# Altium PCB alcotest.PcbDoc
Units mm, origin at the board's own origin, x right, y up, seen from the top; angles counter-clockwise.
Board outline 80 x 36 mm, 2 copper layers (Top Layer, Bottom Layer); 34 components, 21 nets, 123 pads, 62 vias.
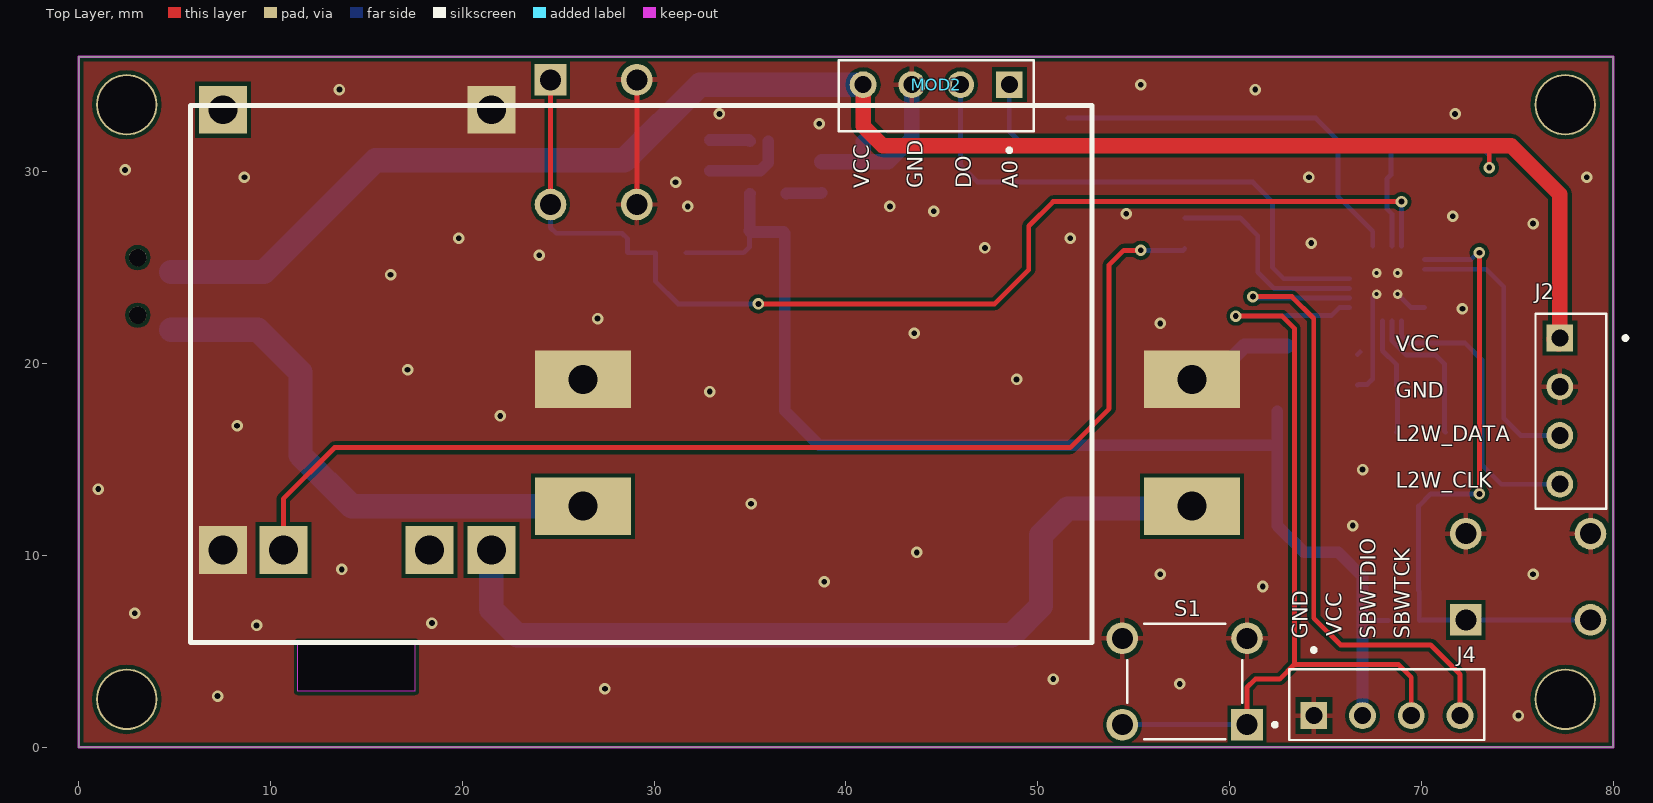
[diagram p0: Top Layer view]
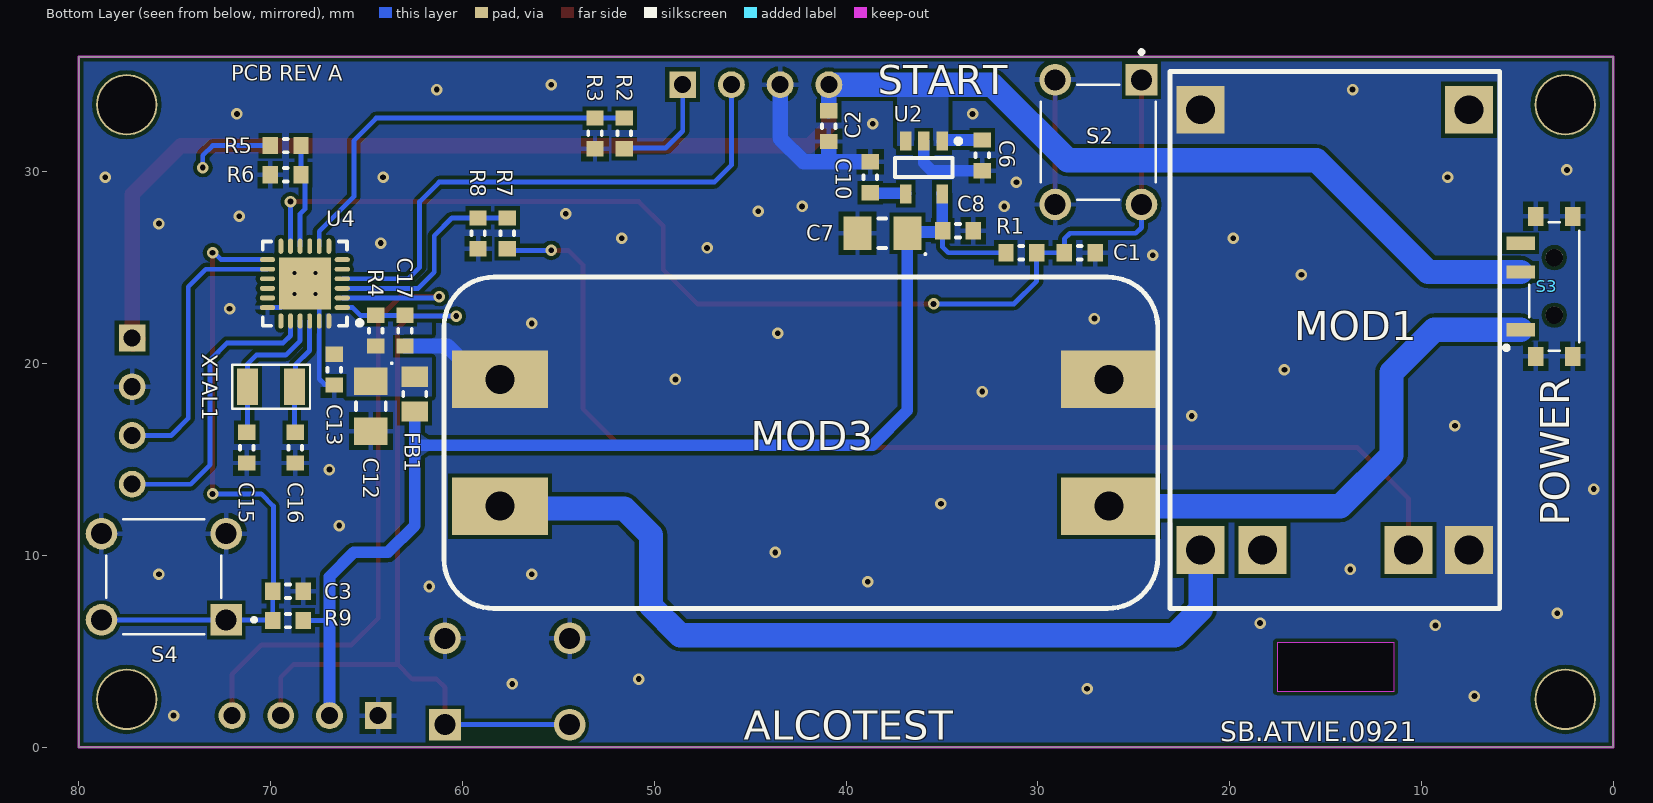
[diagram p1: Bottom Layer view, seen from below]
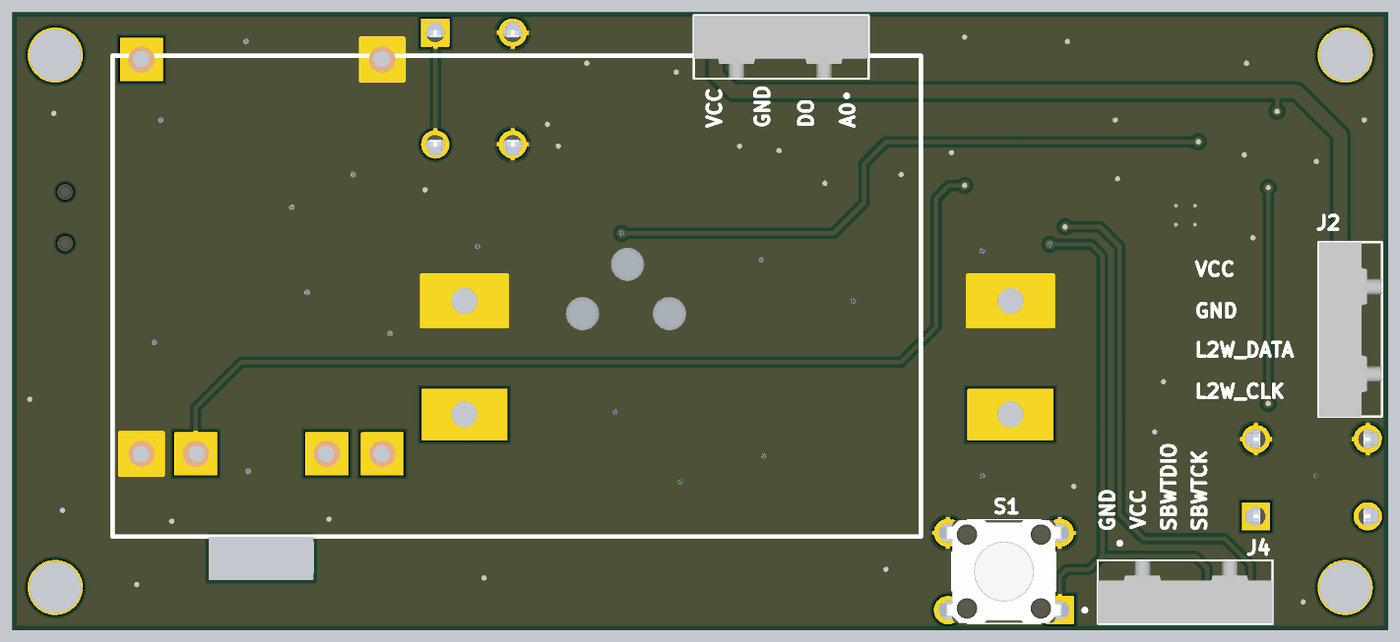
[diagram p2: 3D render of the assembled board from above, using the file's embedded part models]

## Layer stack, top to bottom
Top Solder: solder mask 0.0102, Solder Resist, Dk 3.5
Top Layer: signal copper 0.0356
Dielectric 1: dielectric 0.32, FR-4, Dk 4.8
Bottom Layer: signal copper 0.0356
Bottom Solder: solder mask 0.0102, Solder Resist, Dk 3.5

## Board outline
0,0 80,0 80,36 0,36
cut-out: 11.43,5.461 17.526,5.461 17.526,2.921 11.43,2.921

## Design rules (kind name [scope] priority, off if disabled: settings)
Clearance [All] p1: gap=0.2 ignorepadtopadclearanceinfootprint=FALSE except(0: Arc-Hole Track-Hole SMDPad-Hole THPad-Hole Via-Hole Fill-Hole Poly-Hole Region-Hole Text-Hole; 0.127: Arc-SMDPad Arc-THPad Arc-Text Track-SMDPad Track-THPad Track-Text SMDPad-SMDPad SMDPad-THPad SMDPad-Text THPad-THPad THPad-Text Via-Text Fill-Text Poly-Text Region-Text Text-Text)
PolygonConnect [All] p1: thpad.connectstyle=Relief thpad.reliefconductorwidth=0.254 thpad.reliefentries=4 thpad.polygonreliefangle="90 Angle" thpad.airgapwidth=0.254 smdpad.connectstyle=Relief smdpad.reliefconductorwidth=0.254 smdpad.reliefentries=4 smdpad.polygonreliefangle="90 Angle" smdpad.airgapwidth=0.254 via.connectstyle=Direct via.reliefconductorwidth=0.254 via.reliefentries=4 via.polygonreliefangle="90 Angle" via.airgapwidth=0.254
RoutingVias [All] p1: holewidth=0.3 width=0.6 viastyle="Through Hole" minholewidth=0.3 minwidth=0.6 maxholewidth=0.711 maxwidth=1.27
SolderMaskExpansion [All] p1: expansion=0.102 istentingtop=FALSE
Width [All] p1: maxlimit=2.54 minlimit=0.254 preferedwidth=0.254 minimp=50.000000 maximp=50.000000 favimp=50.000000
30 further rules are at their usual default settings.

## Classes and differential pairs
component class alcotest: C1 C2 C6 C8 C10 C12 C13 C15 C16 C17 FB1 J2 J4 MOD1 MOD2 MOD3 R1 R2 R3 R4 R5 R6 R7 R8 S1 S2 S3 U2 U4

## Components (designator, comment, footprint, x,y, rotation, side; value= is the part's Value field where it differs from the comment)
C1 "100nF/16V" "SMD 0603 GENERIC" 27.813,25.781 r0 bottom
C2 "100nF/16V" "SMD 0603 GENERIC" 40.894,32.385 r90 bottom
C3 "100nF/16V" "SMD 0603 GENERIC" 69.088,8.128 r0 bottom
C6 "100nF" "SMD 0603 GENERIC" 32.893,30.861 r90 bottom
C7 "10uF" "SMD 1206 POLARIZED" 38.1,26.797 r0 bottom
C8 "100nF" "SMD 0603 GENERIC" 34.163,26.924 r0 bottom
C10 "10nF" "SMD 0603 GENERIC" 38.735,29.718 r270 bottom
C12 "4,7uF" "SMD 1206 POLARIZED" 64.77,17.78 r270 bottom
C13 "100nF" "SMD 0603 GENERIC" 66.675,19.685 r90 bottom
C15 "12pF" "SMD 0603 GENERIC" 71.247,15.621 r90 bottom
C16 "12pF" "SMD 0603 GENERIC" 68.707,15.621 r90 bottom
C17 "1nF" "SMD 0603 GENERIC" 62.992,21.717 r90 bottom
FB1 "11R 100 MHz 1.5A" "SMD 0805 GENERIC" 62.484,18.415 r270 bottom
J2 "LCD2WIRE" "THT CON 4-PIN 2.54 WHITE" 77.216,17.526 r270 top
J4 "SPY-BY-WIRE" "THT CON 4-PIN 2.54 WHITE" 68.199,1.651 r0 top
MOD1 "MOD TC4056A 5V 1A" "THT MOD TC4056A 5V 1A" 23.114,35.237 r270 bottom
MOD2 "MOD GAS MQ3" "THT MOD MQ3" 44.704,34.544 r180 top
MOD3 "MOD MT3608 DC/DC BOOST 2A" "THT MOD MT3608 DC/DC BOOST CONV 2A" 23.749,24.511 r0 bottom
R1 "10K" "SMD 0603 GENERIC" 30.861,25.781 r0 bottom
R2 "10K" "SMD 0603 GENERIC" 51.562,32.004 r90 bottom
R3 "10K" "SMD 0603 GENERIC" 53.086,32.004 r270 bottom
R4 "47K" "SMD 0603 GENERIC" 64.516,21.717 r270 bottom
R5 "10K" "SMD 0603 GENERIC" 69.215,31.369 r180 bottom
R6 "10K" "SMD 0603 GENERIC" 69.215,29.845 r0 bottom
R7 "10K" "SMD 0603 GENERIC" 57.658,26.797 r90 bottom
R8 "10K" "SMD 0603 GENERIC" 59.182,26.797 r270 bottom
R9 "10K" "SMD 0603 GENERIC" 69.088,6.604 r180 bottom
S1 "RESET" "THT SWC OMRON B3F-1022" 57.658,3.302 r180 top
S2 "MQ3_PB" "THT SWC OMRON B3F-1022" 26.718,31.548 r270 bottom
S3 "SWC PCM12SM" "SMD SWC PCM12" 3.075,24.027 r90 bottom
S4 "AUX_PB" "THT SWC OMRON B3F-1022" 75.565,8.763 r0 bottom
U2 "TPS79333DBVR" SOT23-5 35.941,30.226 r270 bottom
U4 "MSP430FR2433" VQFN-24 68.211,24.175 r0 bottom
XTAL1 "32.768 KHz" "SMD-2 XTAL ABRACON" 69.977,18.796 r0 bottom

## Footprints (in the part's own frame and the unit in brackets; to place one, negate y for a bottom-side part, rotate by r counter-clockwise, add the part's x,y. Pads: shape width x height; smd on the part's side, far side on the other; paste and mask are expansions set on the pad)
"SMD 0603 GENERIC" [mm]
  rect 0.8x0.9 smd: 1(-0.8,0) 2(0.8,0)
  silkscreen extent -0.1,-0.35 0.1,0.35, body extent -0.85,-0.45 0.85,0.45, height 0.55
"SMD 0805 GENERIC" [mm]
  rect 1.05x1.4 smd: 1(-0.9,0) 2(0.9,0)
  silkscreen extent -0.1,-0.6 0.1,0.6, body extent -1.05,-0.7 1.05,0.7, height 0.6
"SMD 1206 POLARIZED" [mm] "BAUFORM A"
  rect 1.45x1.75 smd: 1(-1.3,0) 2(1.3,0)
  silkscreen extent -2.29,-0.77 0.2,1.14, body extent -1.65,-0.85 1.65,0.85, height 1.6
"SMD SWC PCM12" [mm]
  rect 0.7x1.5 smd: 1(-2.25,1.75) 2(0.75,1.75) 3(2.25,1.75)
  rect 1x0.8 smd: SH(-3.65,-0.965) SH(-3.65,0.965) SH(3.65,-0.965) SH(3.65,0.965)
  round 0.9 hole 0.9 unplated: ""(-1.5,0) ""(1.5,0)
  silkscreen extent -3.35,-1.3 3.35,2.6, body extent -3.86,-2.79 3.86,2.18, height 1.4
"SMD-2 XTAL ABRACON" [mil]
  rect 43x75 smd: 1(-48,0) 2(48,0)
  silkscreen extent -80,-45 80,45, body extent -98,-65 99,65, height 51
SOT23-5 [mm]
  rect 1x0.6 smd: 1(-1.375,0.95) 2(-1.375,0) 3(-1.375,-0.95) 4(1.375,-0.95) 5(1.375,0.95)
  silkscreen extent -1.5,-1.5 0.5,1.92, body extent -0.88,-1.5 0.87,1.5, height 1.45
"THT CON 4-PIN 2.54 WHITE" [mm]
  rect 1.398x1.398 hole 0.89: 1(-3.81,0)
  round 1.398 hole 0.89: 2(-1.27,0) 3(1.27,0) 4(3.81,0)
  silkscreen extent -5.08,-1.27 5.08,3.52, body extent -5.08,-1.25 5.08,2.4, height 9.5
"THT MOD MQ3" [mm]
  rect 1.398x1.398 hole 0.89: 1(-3.81,0)
  round 1.398 hole 0.89: 2(-1.27,0) 3(1.27,0) 4(3.81,0)
  silkscreen extent -5.08,-1.27 5.08,3.52, body extent -5.08,-1.25 5.08,2.4, height 9.5
"THT MOD MT3608 DC/DC BOOST CONV 2A" [mm]
  rect 5x3 hole 1.5: 1(2.54,11.938) 2(2.54,5.334) 3(34.29,11.938) 4(34.29,5.334)
  silkscreen extent 0,0 37.21,17.27, body extent -0.09,-0.49 36.91,17.22, height 5.97
"THT MOD TC4056A 5V 1A" [mm]
  rect 2.5x2.5 hole 1.5: 1(2,15.6) 2(2,1.6) 3(24.95,1.6) 4(24.95,15.6) 5(24.95,4.826) 6(24.95,12.446)
  silkscreen extent 0,0 28,17.2, body extent -0.62,0.14 27.97,17.14, height 3.66
"THT SWC OMRON B3F-1022" [mm]
  rect 1.65x1.65 hole 1.1: 1(-3.25,2.123)
  round 1.65 hole 1.1: 2(3.25,2.123) 3(-3.25,-2.377) 4(3.25,-2.377)
  silkscreen extent -4.8,-3.13 3,2.87, body extent -3.85,-3.13 3.85,2.87, height 5.2
VQFN-24 [mm]
  oval 0.8x0.25 smd: 1(-1.95,1.25) 2(-1.95,0.75) 3(-1.95,0.25) 4(-1.95,-0.25) 5(-1.95,-0.75) 6(-1.95,-1.25) 13(1.95,-1.25) 14(1.95,-0.75) 15(1.95,-0.25) 16(1.95,0.25) 17(1.95,0.75) 18(1.95,1.25)
  oval 0.25x0.8 smd: 7(-1.25,-1.95) 8(-0.75,-1.95) 9(-0.25,-1.95) 10(0.25,-1.95) 11(0.75,-1.95) 12(1.25,-1.95) 19(1.25,1.95) 20(0.75,1.95) 21(0.25,1.95) 22(-0.25,1.95) 23(-0.75,1.95) 24(-1.25,1.95)
  rect 2.7x2.7 smd: 25(0,0)
  silkscreen extent -2.97,-2.2 2.2,2.2, body extent -2.05,-2.05 2.05,2.05, height 1

## Part data
C1 C2 C3 C6 C8 C13: library part "CAP SMD CER 100nF 16V 10% X7R 0603"
C7: library part "CAP SMD TAN 10uF 16V 10% 1206"
C10: library part "CAP SMD CER 10nF 16V 10% X7R 0603"
C12: library part "CAP SMD TAN 4,7uF 35V 10% 1206"
C15 C16: library part "CAP SMD CER 12pF 25V 10% C0G 0603"
C17: library part "CAP SMD CER 1nF 16V 10% X7R 0603"
FB1: library part "FBD SMD 11R 100MHz 1.5A 0805"
J2: library part "CON THT LCD2WIRE 4-PIN 2.54"
J4: library part "CON THT SPY-BY-WIRE 4-PIN 2.54"
R1 R2 R3 R5 R6 R7 R8 R9: library part "RES SMD 10K 1% 0603"
R4: library part "RES SMD 47K 1% 0603"
S1 S2 S4: library part "SWC OMRON B3F-1022"
U2: library part "PWR TPS79333DBVR"
U4: library part "MCU MSP430FR2433IRGET"
XTAL1: library part "XTAL SMD 32.768 KHz ABRACON"

## Free pads (board coordinates)
  round 3.2 hole 3: 1(2.5,2.5) 1(2.5,33.5) 1(77.5,2.5) 1(77.5,33.5)

## Via types
v1: diameter 0.6, hole 0.3, Top Layer to Bottom Layer, tented both sides, 58 vias
v2: diameter 0.5, hole 0.2, Top Layer to Bottom Layer, tented both sides, 4 vias

## Nets (pads, with @x,y where several pads share a name; then routed paths per layer and width w, separated by ;. In a path a pad name is that pad's centre, name@x,y a point inside that pad or via, vN(x,y) a via of type N, cw(c..) or ccw(c..) an arc to the next point about the centre after c; other vN are vias at no path point)
3V3: C7.1 C8.2 FB1.2 J4.2 R1.2 R9.2 U2.5 | length 63.8
  Bottom Layer w0.254: R1.2 34.671,25.781 34.963,26.073 C8.2 ; 66.929,6.604 R9.2
  Bottom Layer w0.61: U2.5 34.986,28.846 34.986,26.947 C8.2 35.026,26.86 36.737,26.86 C7.1 36.8,17.556 38.608,15.748 62.357,15.748 ; FB1.2 62.484,15.748 62.484,11.557 63.881,10.16 65.659,10.16 66.929,8.89 66.929,6.604 J4.2
3V3_FILT: C12.1 C13.2 FB1.1 R4.2 U4.24 | length 0.2
  Bottom Layer w0.254: C13.2 C13.2@66.802,20.612
5V: C2.2 C6.2 J2.1 MOD2.4 R5.1 S3.2 U2.1 U2.3 | length 97.1
  Top Layer w0.254: v1(73.533,30.226) 73.533,31.369
  Top Layer w0.8: MOD2.4 40.894,32.385 41.91,31.369 73.533,31.369 74.676,31.369 77.216,28.829 J2.1
  Top Layer w1.27: J2.1@77.152,21.272 J2.1
  Bottom Layer w0.254: R5.1 73.025,31.369 73.533,30.861 v1(73.533,30.226)
  Bottom Layer w0.61: C6.2 34.931,31.661 U2.1 ; 36.891,34.224 37.211,34.544
  Bottom Layer w0.8: C2.2 MOD2.4
  Bottom Layer w1.27: S3.2 9.64,24.777 15.47,30.607 28.448,30.607 32.385,34.544 37.211,34.544 MOD2.4
AUX_PB: C3.2 R9.1 S4.1 S4.2 U4.13 | length 33.9
  Top Layer w0.254: v1(73.025,13.208) v1(73.025,25.781)
  Bottom Layer w0.254: U4.13 72.575,25.425 72.931,25.781 v1(73.025,25.781) ; v1(73.025,13.208) 70.485,13.208 69.85,12.573 69.85,8.166 C3.2 R9.1 69.924,6.64 S4.1 S4.2
BAT_MONITOR: R7.2 R8.1 U4.3 | length 11.2
  Bottom Layer w0.254: R7.2 R8.1 60.541,27.597 61.468,26.67 61.468,24.765 62.308,23.925 U4.3
GND: C1.1 C2.1 C3.1 C6.1 C7.2 C8.1 C10.1 C12.2 C13.1 C15.1 C16.1 C17.1 J2.2 J4.1 MOD1.2 MOD1.4 MOD2.3 MOD3.2 MOD3.4 R3.2 R6.2 R8.2 S1.3 S1.4 S2.3 S2.4 S3.SH S4.3 S4.4 U2.2 U4.18 U4.23 U4.25 | length 32.8
  Top Layer w0.254: S2.4 S2.3
  Bottom Layer w0.254: 40.767,30.518 40.894,30.645 ; C13.1 66.713,18.923 67.183,18.923 67.461,19.201 U4.23 67.461,23.425 v2(67.661,23.625) ; v2(68.761,23.625) 69.461,22.925 U4.18
  Bottom Layer w0.61: C6.1 35.522,30.061 35.941,30.48 U2.2
  Bottom Layer w0.8: C10.1 40.767,30.518 42.202,30.518 43.434,31.75 MOD2.3 ; 40.894,30.645 C2.1 ; MOD3.4 59.039,19.177 60.779,20.917 C17.1
  other v1: 75.057,1.651 7.239,2.667 27.432,3.048 57.404,3.302 50.8,3.556 9.271,6.35 18.415,6.477 2.921,6.985 61.722,8.382 38.862,8.636 56.388,9.017 75.819,9.017 13.716,9.271 43.688,10.16 66.421,11.557 35.052,12.7 1.016,13.462 66.929,14.478 8.255,16.764 21.971,17.272 32.893,18.542 48.895,19.177 17.145,19.685 43.561,21.59 56.388,22.098 27.051,22.352 72.136,22.86 16.256,24.638 24.003,25.654 47.244,26.035 64.262,26.289 19.812,26.543 51.689,26.543 75.819,27.305 71.628,27.686 54.61,27.813 44.577,27.94 31.75,28.194 42.291,28.194 31.115,29.464 8.636,29.718 64.135,29.718 78.613,29.718 2.413,30.099 38.608,32.512 33.401,33.02 71.755,33.02 13.589,34.29 61.341,34.29 55.372,34.544
  other v2: 67.661,24.725 68.761,24.725
MQ3_AO: R2.2 R3.1 U4.8 | length 20.9
  Bottom Layer w0.254: R2.2 R3.1 64.516,32.804 64.516,32.766 65.659,31.623 65.659,28.702 67.461,26.9 U4.8
MQ3_DO: MOD2.2 U4.4 | length 28.9
  Bottom Layer w0.254: MOD2.2 45.974,30.353 46.863,29.464 61.214,29.464 62.23,28.448 62.23,25.019 62.824,24.425 U4.4
MQ3_PB: C1.2 R1.1 S2.1 S2.2 U4.11 | length 60.9
  Top Layer w0.254: S2.2 S2.1 ; v1(35.433,23.114) 47.752,23.114 49.53,24.892 49.53,27.178 50.8,28.448 v1(68.961,28.448)
  Bottom Layer w0.254: S2.2 24.595,27.094 24.892,26.797 28.321,26.797 28.613,26.505 C1.2 R1.1 30.061,24.295 31.242,23.114 v1(35.433,23.114) ; U4.11 v1(68.961,28.448)
NetC10_2: C10.2 U2.4 | length 1.9
  Bottom Layer w0.61: U2.4 36.891,28.88 36.896,28.885 38.701,28.885 C10.2
NetC15_2: C15.2 U4.21 XTAL1.2 | length 7.9
  Bottom Layer w0.254: U4.21 68.461,21.201 69.215,20.447 70.739,20.447 71.196,19.99 XTAL1.2 71.196,16.472 C15.2
NetC16_2: C16.2 U4.22 XTAL1.1 | length 6.2
  Bottom Layer w0.254: U4.22 67.961,20.685 68.707,19.939 68.707,18.847 XTAL1.1 68.758,16.472 C16.2
NetC17_2: C17.2 J4.3 R4.1 S1.1 S1.2 U4.1 | length 46.9
  Top Layer w0.254: v1(60.325,22.479) 62.738,22.479 63.373,21.844 63.373,4.318 ; S1.1 60.908,3.123 61.341,3.556 62.611,3.556 63.373,4.318 ; J4.3 69.469,3.647 68.798,4.318 63.373,4.318
  Bottom Layer w0.254: S1.2 S1.1 ; v1(60.325,22.479) 62.954,22.479 C17.2 R4.1 65.316,22.517 65.722,22.923 66.259,22.923 U4.1 ; J4.3@69.342,1.778 J4.3
NetJ2_3: J2.3 U4.14 | length 14.7
  Bottom Layer w0.254: U4.14 73.373,24.925 74.295,24.003 74.295,17.145 75.184,16.256 J2.3
NetJ2_4: J2.4 U4.20 | length 15.4
  Bottom Layer w0.254: U4.20 68.961,21.463 69.342,21.082 72.263,21.082 73.152,20.193 73.152,14.732 74.168,13.716 J2.4
NetJ4_4: J4.4 U4.2 | length 35.3
  Top Layer w0.254: v1(61.214,23.495) 63.246,23.495 64.389,22.352 64.389,6.731 65.786,5.334 70.485,5.334 72.009,3.81 J4.4
  Bottom Layer w0.254: v1(61.214,23.495) 61.308,23.495 61.378,23.425 U4.2
NetMOD1_3: MOD1.3 MOD3.3 | length 46.7
  Top Layer w1.27: MOD1.3 MOD1.3@22.022,9.779 ; MOD3.3@57.658,12.192 MOD3.3 MOD3.3@57.785,12.827
  Bottom Layer w1.27: MOD1.3 21.514,7.188 22.86,5.842 48.641,5.842 50.165,7.366 50.165,11.049 51.562,12.446 57.912,12.446 MOD3.3
NetMOD2_1: MOD2.1 R2.1 | length 5.8
  Bottom Layer w0.254: MOD2.1 48.514,32.131 49.403,31.242 51.524,31.242 R2.1
NetMOD3_1: MOD3.1 S3.1 | length 27.8
  Bottom Layer w1.27: S3.1 9.338,21.777 11.557,19.558 11.557,15.24 14.224,12.573 MOD3.1
V_MONITOR: R5.2 R6.1 U4.10 | length 5.4
  Bottom Layer w0.254: R5.2 R6.1 68.199,29.629 68.199,28.067 68.461,27.805 U4.10
VBAT: MOD1.6 R7.1 | length 59.4
  Top Layer w0.254: MOD1.6 10.668,12.954 13.335,15.621 51.689,15.621 53.721,17.653 53.721,25.146 54.483,25.908 v1(55.372,25.908)
  Bottom Layer w0.254: v1(55.372,25.908) 57.569,25.908 R7.1
pads on no net: MOD1.1 MOD1.5 S3. S3.3 U4.5 U4.6 U4.7 U4.9 U4.12 U4.15 U4.16 U4.17 U4.19

## Polygon pours and split planes (outlines as drawn)
GND on Top Layer "TOP_GND_POLY" (solid, remove dead copper, pour order 10): 0,35.941 80.01,35.941 80.01,0 0,0
NetC17_2 on Top Layer "NetC17_2" (solid, remove dead copper, pour order 13): 64.262,4.064
NetC17_2 on Top Layer "NetC17_2" (solid, remove dead copper, pour order 12): 63.373,4.318 62.611,3.556 64.008,3.556
no net on Top Layer "NONET_L01_P000" (solid, remove dead copper, pour order 0): 0,59.944
GND on Bottom Layer "BOTTOM_GND_POLY" (solid, remove dead copper, pour order 9): 0,35.941 80.01,35.941 80.01,0 0,0
3V3 on Bottom Layer "3V3_POLY" (solid, remove dead copper, pour order 8): 62.611,16.637 61.341,15.748 62.611,14.859
no net on Bottom Layer "5V_POLY" (solid, remove dead copper, pour order 7): 62.611,16.383
3V3_FILT on Bottom Layer "MCU_PWR_POLY" (solid, remove dead copper, pour order 6): 61.595,22.606 67.183,22.606 67.183,18.288 61.595,18.288
5V on Bottom Layer "5V_POLY" (solid, remove dead copper, pour order 5): 37.719,32.893
5V on Bottom Layer "5V_POLY" (solid, remove dead copper, pour order 4): 34.671,34.163 34.671,31.369 37.338,31.369 37.338,34.163

## Keep-outs
Keep-Out Layer:
  the board outline again, w0.127

## Silkscreen, mask and mechanical layers (free items; w line width, h text height)
Top Overlay:
  lines w0.254: 5.832,5.461 5.832,33.461 52.832,33.461 52.832,5.461 5.832,5.461
  text "VCC" at 41.202,29.156 h0.8 r90
  text "GND" at 43.996,29.156 h0.8 r90
  text "DO" at 46.536,29.156 h0.8 r90
  text "A0" at 48.949,29.156 h0.8 r90
  text "VCC" at 68.653,20.647 h0.8
  text "GND" at 68.653,18.234 h0.8
  text "L2W_DATA" at 68.653,15.954 h0.8
  text "L2W_CLK" at 68.653,13.541 h0.8
  text "VCC" at 65.84,5.788 h0.8 r90
  text "GND" at 64.062,5.661 h0.8 r90
  text "SBWTDIO" at 67.618,5.661 h0.8 r90
  text "SBWTCK" at 69.396,5.661 h0.8 r90
Bottom Overlay:
  text "PCB REV A" at 72.063,34.744 h0.8
  text "START" at 38.354,34.036 h1.52
  text "POWER" at 2.286,11.557 h1.52 r270
  text "ALCOTEST" at 45.339,0.381 h1.52
  text "SB.ATVIE.0921" at 20.501,0.327 h1